# Altium PCB Microcontroller_PCB_2_Layer.PcbDoc
Units mm, origin at the board's own origin, x right, y up, seen from the top; angles counter-clockwise.
Board outline 69 x 47 mm, 2 copper layers (Top Layer, Bottom Layer), stack 1.601 mm thick; 50 components, 46 nets, 216 pads, 104 vias.
Unrouted connection lines stored in the file: 3.
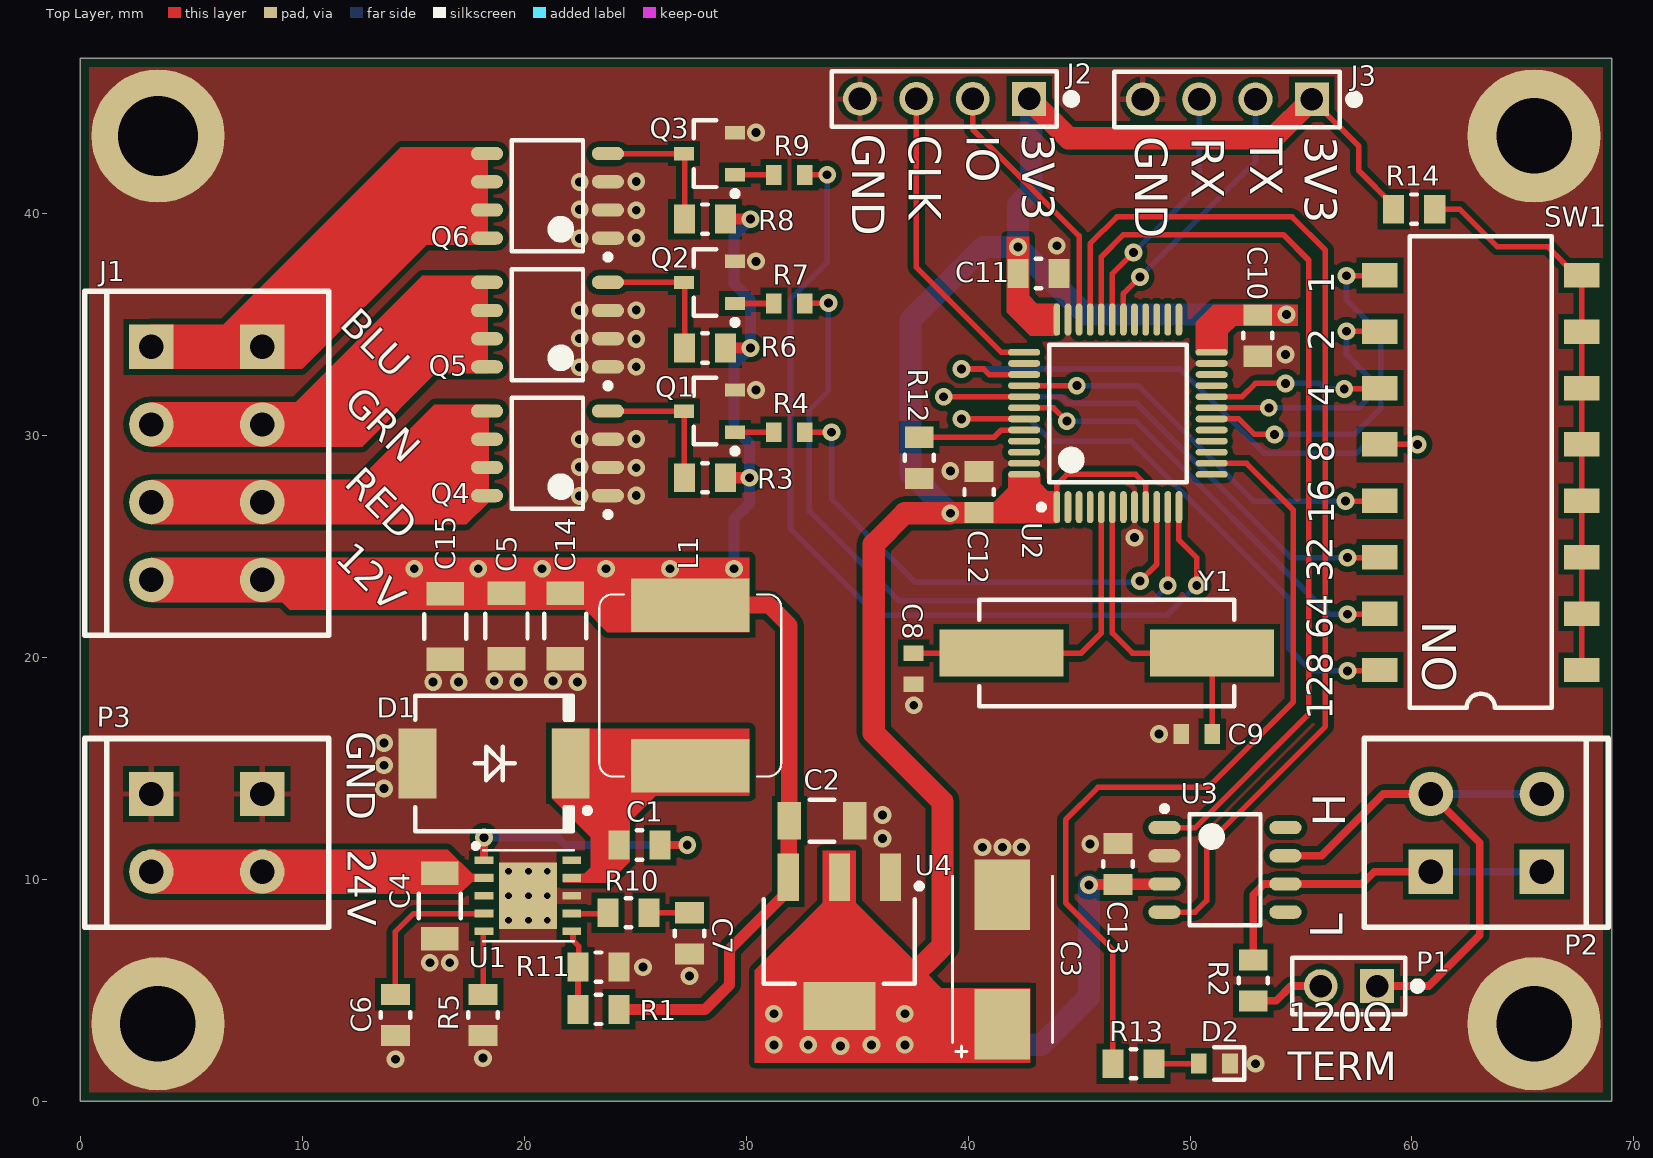
[diagram p0: Top Layer view]
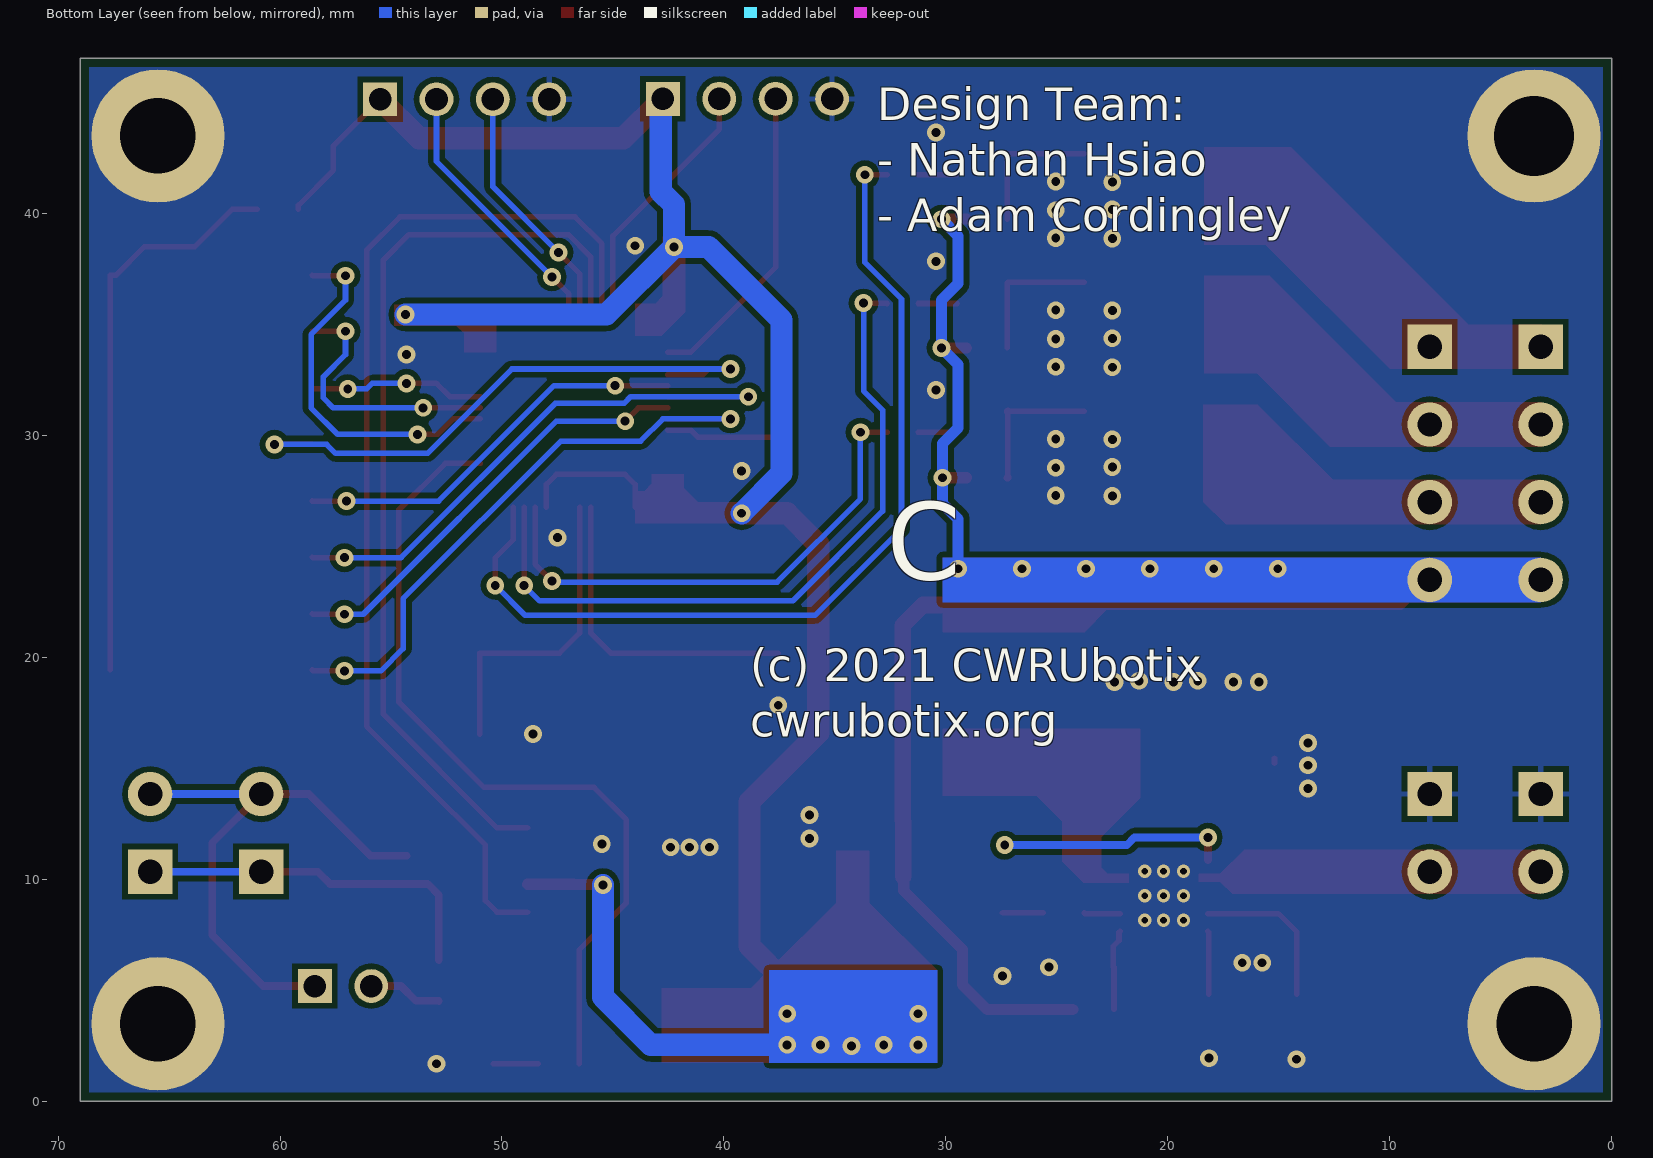
[diagram p1: Bottom Layer view, seen from below]

## Layer stack, top to bottom
Top Solder: solder mask 0.0102, Solder Resist, Dk 3.5
Top Layer: signal copper 0.0356
Dielectric 1: dielectric 1.53, FR-4, Dk 4.8
Bottom Layer: signal copper 0.0356
Bottom Solder: solder mask 0.0102, Solder Resist, Dk 3.5

## Board outline
0,0 69,0 69,47 0,47

## Design rules (kind name [scope] priority, off if disabled: settings)
BoardOutlineClearance [All] p1: gap=0.4 ignorepadtopadclearanceinfootprint=FALSE except(0: Arc-SplitContinuation Track-SplitContinuation SMDPad-SplitContinuation THPad-SplitContinuation Via-SplitContinuation Fill-SplitContinuation Poly-SplitContinuation Region-SplitContinuation Text-SplitContinuation)
Clearance [All] p1: gap=0.25 ignorepadtopadclearanceinfootprint=FALSE except(0: Arc-Hole Track-Hole SMDPad-Text SMDPad-Hole THPad-Hole Via-Hole Fill-Hole Poly-Hole Region-Hole Text-Hole; 0.2: Arc-Arc Arc-Track Arc-SMDPad Arc-THPad Arc-Via Track-Track Track-SMDPad Track-THPad Track-Via SMDPad-SMDPad SMDPad-THPad SMDPad-Via THPad-THPad THPad-Via Via-Via; 0.254: Arc-Text Track-Text THPad-Text Via-Text Fill-Text Poly-Text Region-Text Text-Text)
HoleSize [All] p1: absolutevalues=TRUE maxlimit=6 minlimit=0.2 maxpercent=80.000 minpercent=20.000
MinimumSolderMaskSliver [All] p1: minsoldermaskwidth=0.15
PolygonConnect [All] p1: thpad.connectstyle=Relief thpad.reliefconductorwidth=0.254 thpad.reliefentries=4 thpad.polygonreliefangle="90 Angle" thpad.airgapwidth=0.254 smdpad.connectstyle=Direct smdpad.reliefconductorwidth=0.254 smdpad.reliefentries=4 smdpad.polygonreliefangle="90 Angle" smdpad.airgapwidth=0.254 via.connectstyle=Direct via.reliefconductorwidth=0.254 via.reliefentries=4 via.polygonreliefangle="90 Angle" via.airgapwidth=0.254
RoutingVias [All] p1: holewidth=0.17 width=0.27 viastyle="Through Hole" minholewidth=0.15 minwidth=0.25 maxholewidth=0.2 maxwidth=0.45
SMDNeckDown [All] p1: percent=100.000
SilkToSilkClearance [All] p1: silktosilkclearance=0
SilkToSolderMaskClearance [IsPad] p1: minsilkscreentomaskgap=0 clearancetoexposedcopper=TRUE
SolderMaskExpansion [All] p1: expansion=0.102 istentingtop=FALSE
Width [All] p1: maxlimit=25 minlimit=0.15 preferedwidth=0.25 minimp=50.000000 maximp=50.000000 favimp=50.000000
26 further rules are at their usual default settings.

## Components (designator, comment, footprint, x,y, rotation, side; value= is the part's Value field where it differs from the comment)
C1 "0.10uF" chip_0805 25.2,11.55 r0 top
C2 "10uF" chip_1206 33.425,12.65 r0 top
C3 "100uF" chip_2917_AVX_TAJD 41.55,6.4 r90 top
C4 "2.2uF" chip_1206 16.2,8.8 r270 top
C5 "22uF" chip_1206 19.2,21.425 r270 top
C6 "2700pF" chip_0805 14.2,3.9 r270 top
C7 "820pF" chip_0805 27.45,7.575 r270 top
C8 "18pF" chip_0603 37.55,19.5 r90 top
C9 "18pF" chip_0603 50.3,16.55 r180 top
C10 "0.10uF" chip_0805 53.05,34.5 r90 top
C11 "0.10uF" chip_0805 43.175,37.3 r0 top
C12 "0.10uF" chip_0805 40.5,27.45 r270 top
C13 "0.10uF" chip_0805 46.75,10.7 r270 top
C14 "22uF" chip_1206 21.85,21.425 r270 top
C15 "2.2uF" chip_1206 16.45,21.4 r270 top
D1 "700mV" do-214ab 18.645,15.23 r180 top
D2 "2.65V" chip_0603_LED 51.1,1.7 r180 top
J1 "conn-4x1_0" TERM_3.50MM_4x1_0 8.2,34 r270 top
J2 "conn-4x1_0" HDDR_4x1_0 42.75,45.17 r180 top
J3 "conn-4x1_0" HDDR_4x1_0 55.49,45.15 r180 top
L1 "ind_1" VISHAY_IHLP3232DZ 27.485,18.745 r90 top
P1 "conn-2x1_0" HDDR_2x1_0 57.15,5.2 r180 top
P2 "conn-2x1_0" TERM_3.50MM_2x1_0 65.85,10.35 r90 top
P3 "conn-2x1_0" TERM_3.50MM_2x1_0 3.2,13.85 r270 top
Q1 "MMBT3904LT1G" SOT-23-3_1 28.35,31.1 r180 top
Q2 "MMBT3904LT1G" SOT-23-3_1 28.35,36.9 r180 top
Q3 "MMBT3904LT1G" SOT-23-3_1 28.35,42.7 r180 top
Q4 "FDS5351" SO-8 21.05,29.2 r180 top
Q5 "FDS5351" SO-8 21.05,35 r180 top
Q6 "FDS5351" SO-8 21.05,40.8 r180 top
R1 "60.4k" chip_0805 23.35,4.15 r180 top
R2 "120" chip_0805 52.85,5.45 r90 top
R3 "1k" chip_0805 28.15,28.1 r180 top
R4 "3.3k" chip_0603 31.95,30.15 r0 top
R5 "174k" chip_0805 18.15,3.9 r270 top
R6 "1k" chip_0805 28.15,33.95 r180 top
R7 "3.3k" chip_0603 31.95,35.95 r0 top
R8 "1k" chip_0805 28.15,39.75 r180 top
R9 "3.3k" chip_0603 31.95,41.75 r0 top
R10 "23.7k" chip_0805 24.7,8.5 r0 top
R11 "11.5k" chip_0805 23.35,6.05 r0 top
R12 "1k" chip_0805 37.8,29 r270 top
R13 "665" chip_0805 47.45,1.7 r180 top
R14 "665" chip_0805 60.1,40.2 r180 top
SW1 "DIP_SW_8" A6S-8104-H 67.55,19.44 r180 top
U1 "TPS54561" WSON-10_0 20.195,9.265 r0 top
U2 "STM32F103C8" LQFP48_0 46.75,31 r90 top
U3 "SN65HVD232" SO-8 51.575,10.435 r0 top
U4 "LM1117" sot-223-4 34.2,7.2 r270 top
Y1 "osc_xtal_2p_0" ABLS_AT49_OSC 46.25,20.2 r0 top

## Footprints (in the part's own frame and the unit in brackets; to place one, negate y for a bottom-side part, rotate by r counter-clockwise, add the part's x,y. Pads: shape width x height; smd on the part's side, far side on the other; paste and mask are expansions set on the pad)
A6S-8104-H [mm]
  rect 1.6x1.1 smd: 1(-0.1,0) 2(-0.1,-2.54) 3(-0.1,-5.08) 4(-0.1,-7.62) 5(-0.1,-10.16) 6(-0.1,-12.7) 7(-0.1,-15.24) 8(-0.1,-17.78) 9(9,-17.78) 10(9,-15.24) 11(9,-12.7) 12(9,-10.16) 13(9,-7.62) 14(9,-5.08) 15(9,-2.54) 16(9,0)
  silkscreen extent 1.25,-19.55 7.65,1.7, body extent -0.45,-19.53 9.35,1.73, height 4.4
ABLS_AT49_OSC [mil] "ABLS Crystal Oscillator"
  rect 220x83 smd: 1(-187.01,0) 2(186.99,0)
  silkscreen extent -226,-94 226,94, body extent -224,-94 224,94, height 157
chip_0603 [mm]
  rect 0.7x0.9 smd: 1(-0.7,0) 2(0.7,0)
  body extent -0.85,-0.45 0.85,0.45, height 0.6
chip_0603_LED [mm]
  rect 0.7x0.9 smd: 1(-0.7,0) 2(0.7,0)
  silkscreen extent -1.35,-0.75 0,0.73, body extent -0.85,-0.45 0.85,0.45, height 0.6
chip_0805 [mm]
  rect 0.95x1.3 smd: 1(-0.925,0) 2(0.925,0)
  silkscreen extent -0.13,-0.66 0.13,0.66, body extent -1.05,-0.65 1.05,0.65, height 0.6
chip_1206 [mm]
  rect 1.05x1.7 smd: 1(-1.475,0) 2(1.475,0)
  silkscreen extent -0.55,-0.95 0.55,0.95, body extent -1.65,-0.85 1.65,0.85, height 0.6
chip_2917_AVX_TAJD [mm] "2917 footprint for AVX TAJD"
  rect 3.175x2.5 smd: 1(-2.921,0) 2(2.921,0)
  silkscreen extent -4.4,-2.25 3.75,2.25, body extent -3.75,-2.25 3.75,2.25, height 3.15
do-214ab [mm] "DO-214AB, SMC"
  rect 1.7x3.15 smd: 1(-3.45,0) 2(3.45,0)
  silkscreen extent -4.33,-3.05 3.55,3.05, body extent -3.56,-3.05 3.55,3.05, height 2.41
HDDR_2x1_0 [mil] "0.1\" Header 2x1"
  rect 60x60 hole 40: 1(-50.39,0)
  round 60 hole 40: 2(49.61,0)
  silkscreen extent -128,-50 100,50, body extent -100,-50 100,50, height 336
HDDR_4x1_0 [mil]
  rect 60x60 hole 40: 1(0,0)
  round 60 hole 40: 2(100,0) 3(200,0) 4(300,0)
  silkscreen extent -83,-49 350,49, body extent -50,-50 350,50, height 336
LQFP48_0 [mm] "LQFP48, 7.00x7.00mm, 0.50mm"
  oval 1.45x0.3 smd: 1(-4.225,2.75) 2(-4.225,2.25) 3(-4.225,1.75) 4(-4.225,1.25) 5(-4.225,0.75) 6(-4.225,0.25) 7(-4.225,-0.25) 8(-4.225,-0.75) 9(-4.225,-1.25) 10(-4.225,-1.75) 11(-4.225,-2.25) 12(-4.225,-2.75) 25(4.225,-2.75) 26(4.225,-2.25) 27(4.225,-1.75) 28(4.225,-1.25) 29(4.225,-0.75) 30(4.225,-0.25) 31(4.225,0.25) 32(4.225,0.75) 33(4.225,1.25) 34(4.225,1.75) 35(4.225,2.25) 36(4.225,2.75)
  oval 0.3x1.45 smd: 13(-2.75,-4.225) 14(-2.25,-4.225) 15(-1.75,-4.225) 16(-1.25,-4.225) 17(-0.75,-4.225) 18(-0.25,-4.225) 19(0.25,-4.225) 20(0.75,-4.225) 21(1.25,-4.225) 22(1.75,-4.225) 23(2.25,-4.225) 24(2.75,-4.225) 37(2.75,4.225) 38(2.25,4.225) 39(1.75,4.225) 40(1.25,4.225) 41(0.75,4.225) 42(0.25,4.225) 43(-0.25,4.225) 44(-0.75,4.225) 45(-1.25,4.225) 46(-1.75,4.225) 47(-2.25,4.225) 48(-2.75,4.225)
  silkscreen extent -4.35,-3.1 3.1,3.57, body extent -3.5,-3.5 3.5,3.5, height 1.6
SO-8 [mm] "SO-8 Package"
  oval 1.45x0.6 smd: 1(-2.725,1.905) 2(-2.725,0.635) 3(-2.725,-0.635) 4(-2.725,-1.905) 5(2.725,-1.905) 6(2.725,-0.635) 7(2.725,0.635) 8(2.725,1.905)
  silkscreen extent -2.85,-2.5 1.6,2.88, body extent -3.08,-2.5 3.08,2.5, height 2
SOT-23-3_1 [mm] "SOT-23-3 package"
  rect 0.9x0.6 smd: 1(-1.15,0.95) 2(-1.15,-0.95) 3(1.15,0)
  silkscreen extent -1.28,-1.5 0.7,1.92, body extent -1.42,-1.5 1.42,1.5, height 1.2
sot-223-4 [mm]
  rect 2.15x0.95 smd: 1(-2.9,2.3) 2(-2.9,0) 3(-2.9,-2.3)
  rect 2.15x3.25 smd: 4(2.9,0)
  silkscreen extent -2.62,-3.4 1.9,3.73, body extent -1.9,-3.4 1.9,3.4, height 1.1
TERM_3.50MM_2x1_0 [mm] "Terminal Block, 3.5mm pitch"
  rect 2x2 hole 1.1: 1(0,5) 1(0,0)
  round 2 hole 1.1: 2(3.5,0) 2(3.5,5)
  silkscreen extent -2.5,-3 6,8, body extent -2.5,-3 6,8, height 8.98
TERM_3.50MM_4x1_0 [mm]
  rect 2x2 hole 1.1: 1(0,0) 1(0,-5)
  round 2 hole 1.1: 2(3.5,0) 2(3.5,-5) 3(7,0) 3(7,-5) 4(10.5,0) 4(10.5,-5)
  silkscreen extent -2.5,-8 13,3, body extent -2.5,-8 13,3, height 8.98
VISHAY_IHLP3232DZ [mil] "Inductor, Vishay Dale, IHLP-3232DZ series"
  rect 95x210 smd: 1(-142.52,0) 2(142.52,0)
  silkscreen extent -161,-161 161,161, body extent -161,-161 161,161, height 157
WSON-10_0 [mm]
  rect 0.85x0.35 smd mask+0.07: 1(-2,1.6) 2(-2,0.8) 3(-2,0) 4(-2,-0.8) 5(-2,-1.6) 6(1.95,-1.6) 7(1.95,-0.8) 8(1.95,0) 9(1.95,0.8) 10(1.95,1.6)
  rect 2.6x3 smd mask+0.07: 11(-0.025,0)
  silkscreen extent -2.47,-2.05 2.05,2.35, body extent -2.05,-2.05 2.05,2.05, height 0.8

## Part data
C1 C10 C11 C12 C13: library part CAP-00069, "CAP, 0.10uF, 10%, 16V, X7R, 0805", Manufacturer=Murata, Manufacturer PN=GRM219R71C104KA01D, Tolerance=10%, Voltage Rating=16V, Capacitance=0.10uF, Part Number=CAP-00069, Type=X7R
C2: library part CAP-00539, "CAP, 10uF, ±10%, 25V, X7R, 1206", Manufacturer=Samsung, Manufacturer PN=CL31B106KAHNNNE, Tolerance=±10%, Voltage Rating=25V, Capacitance=10uF, Part Number=CAP-00539, Type=X7R
C3: library part CAP-00550, "CAP, 100uF, ±10%, 16V, Tantalum, 2917", Manufacturer=AVX, Manufacturer PN=TAJD107K016RNJ, Tolerance=±10%, Voltage Rating=16V, Capacitance=100uF, Cost=$0.94, Part Number=CAP-00550, Type=Tantalum
C4 C15: library part CAP-00563, "CAP, 2.2uF, ±10%, 50V, X7R, 1206", Manufacturer=KEMET, Manufacturer PN=C1206C225K5RACTU, Tolerance=±10%, Voltage Rating=50V, Capacitance=2.2uF, Cost=$0.33, Part Number=CAP-00563, Type=X7R
C5 C14: library part CAP-00587, "CAP, 22uF, ±10%, 25V, X5R, 1206", Manufacturer="Samsung Electro-Mechanics", Manufacturer PN=CL31A226KAHNNNE, Tolerance=±10%, Voltage Rating=25V, Capacitance=22uF, Cost=$0.41, Part Number=CAP-00587, Type=X5R
C6: library part CAP-00024, "CAP, 2700pF, 10%, 50V, X7R, 0805", Manufacturer=Murata, Manufacturer PN=GRM216R71H272KA01D, Tolerance=10%, Voltage Rating=50V, Capacitance=2700pF, Part Number=CAP-00024, Type=X7R
C7: library part CAP-00008, "CAP, 820pF, 10%, 50V, X7R, 0805", Manufacturer=Murata, Manufacturer PN=GRM216R71H821KA01D, Tolerance=10%, Voltage Rating=50V, Capacitance=820pF, Part Number=CAP-00008, Type=X7R
C8 C9: library part CAP-00409, "CAP, 18pF, ±2%, 50V, C0G, 0603", Manufacturer=Murata, Manufacturer PN=GRM1885C1H180GA01D, Tolerance=±2%, Voltage Rating=50V, Capacitance=18pF, Part Number=CAP-00409, Type=C0G
D1: library part DIO-00048, "Dio, Schottky, 5A, 700mV, 60V, SMC", Current Rating=5A, Manufacturer="Diodes Incorporated", Manufacturer PN=B560C-13-F, Reverse Breakdown Voltage=60V, Cost=0.5, Forward Voltage=700mV, Part Number=DIO-00048, Type=Schottky
D2: library part DIO-00050, "LED, Green, 0603, Low current, HELI2 Series", Current Rating=30mA, Manufacturer=Kingbright, Manufacturer PN=APT1608LZGCK, Power Rating=120mW, Reverse Breakdown Voltage=5V, Cost=0.58, Forward Voltage=2.65V, Part Number=DIO-00050, Type=LED
J1: library part CONN-00024, "Term Blk, 4 Pos, 8A, 3.5mm Pitch, Screwless", Current=8, Manufacturer="Phoenix Contact", Manufacturer PN=1861959, Cost=1.67, Levels=1, Part Number=CONN-00024, Positions per level=4, Type="Terminal Block", Weight=2.3
J2 J3: library part CONN-00029, "Header 4x1, 0.1\"", Levels=1, Part Number=CONN-00029, Positions per level=4, Type=Header
L1: library part MAG-00106, "Ind, 10uH, 20%, 5.2A (9A sat.), 0.0599 Ohm", Current Rating=5.2A, Inductance=10uH, Manufacturer="Vishay Dale", Manufacturer PN=IHLP3232DZER100M01, Tolerance=20%, Cost=1.65, DCR=59.9mOhm, Part Number=MAG-00106
P1: library part CONN-00055, "Header, 2x1, 0.1\"", Manufacturer=Samtec, Manufacturer PN=TSW-102-07-F-S, Cost=0.2, Levels=1, Part Number=CONN-00055, Positions per level=2, Type=Header
P2 P3: library part CONN-00023, "Term Blk, 2 Pos, 8A, 3.5mm Pitch, Screwless", Current=8, Manufacturer="Phoenix Contact", Manufacturer PN=1861933, Cost=0.79, Levels=1, Part Number=CONN-00023, Positions per level=2, Type="Terminal Block", Weight=1.13
Q1 Q2 Q3: library part XSTR-00037, "XSTR, NPN, 200mA, 40V, Vce 0.3V, SOT-23-3", Manufacturer="ON Semi", Max Current=200mA, Max Power=300mW, Max Voltage=40V, Cost=0.12, Manufacturer PN=MMBT3904LT1G, Part Number=XSTR-00037, Type=NPN, Vgs/Vce=0.3V
Q4 Q5 Q6: library part XSTR-00034, "XSTR NFET, 6.1A, 60V, 5W, SOIC-8", Manufacturer="ON Semi", Max Current=6.1A, Max Power=5W, Max Voltage=60V, Cost=0.8, Manufacturer PN=FDS5351, Part Number=XSTR-00034, Type=NFET, Vgs/Vce=2.0V
R1: library part RES-00531, "RES SMD 60.4K OHM 1% 1/8W 0805", Manufacturer="Rohm Semiconductor", Manufacturer PN=KTR10EZPF6042, Power Rating=0.125W, Tolerance=1%, Part Number=RES-00531, Resistance=60.4k
R2: library part RES-00183, "RES SMD 120 OHM 1% 1/8W 0805", Manufacturer="Rohm Semiconductor", Manufacturer PN=KTR10EZPF1200, Power Rating=0.125W, Tolerance=1%, Part Number=RES-00183, Resistance=120
R3 R6 R8 R12: library part RES-00361, "RES SMD 1K OHM 1% 1/8W 0805", Manufacturer="Rohm Semiconductor", Manufacturer PN=KTR10EZPF1001, Power Rating=0.125W, Tolerance=1%, Part Number=RES-00361, Resistance=1k
R4 R7 R9: library part RES-00419, "RES SMD 3.3K OHM 1% 1/4W 0603", Manufacturer=Panasonic, Manufacturer PN=ERJ-PA3F3301V, Power Rating=0.25W, Tolerance=1%, Part Number=RES-00419, Resistance=3.3k
R5: library part RES-00350, "RES SMD 174K OHM 1% 1/8W 0805", Manufacturer="Rohm Semiconductor", Manufacturer PN=KTR10EZPF1743, Power Rating=0.125W, Tolerance=1%, Part Number=RES-00350, Resistance=174k
R10: library part RES-00392, "RES SMD 23.7K OHM 1% 1/8W 0805", Manufacturer="Rohm Semiconductor", Manufacturer PN=KTR10EZPF2372, Power Rating=0.125W, Tolerance=1%, Part Number=RES-00392, Resistance=23.7k
R11: library part RES-00309, "RES SMD 11.5K OHM 1% 1/8W 0805", Manufacturer="Rohm Semiconductor", Manufacturer PN=KTR10EZPF1152, Power Rating=0.125W, Tolerance=1%, Part Number=RES-00309, Resistance=11.5k
R13 R14: library part RES-00248, "RES SMD 665 OHM 1% 1/8W 0805", Manufacturer="Rohm Semiconductor", Manufacturer PN=KTR10EZPF6650, Power Rating=0.125W, Tolerance=1%, Part Number=RES-00248, Resistance=665
SW1: library part MISC-00045, "DIP Switch, 8 Switches, SMD, 25mA, 24V", Manufacturer=Omron, Manufacturer PN=A6S-8104-H, Cost=2.85, Part Number=MISC-00045
U1: library part PWREG-00033, "REG, SW Buck Adj, 5A, 4.5-60V, 2.5MHz, TPS54561", Frequency=100kHz-2.5MHz, Manufacturer=TI, Manufacturer PN=TPS54561DPRR, Max Current=5A, Voltage Range In=4.5-60V, Voltage Range Out=0.8-58.8V, Cost=5.52, Fixed/Adj=Adj, Part Number=PWREG-00033, Reg Type="SW Buck"
U2: library part UCTRL-00008, "STM32 M3, LQFP-48", Manufacturer=ST, Manufacturer PN=STM32F103C8, Part Number=UCTRL-00008
U3: library part IFACE-00008, "CANbus Transceiver, Single channel, SN65HVD232", Manufacturer=TI, Manufacturer PN=SN65HVD232DR, Cost=2.01, Part Number=IFACE-00008
U4: library part PWREG-00018, "REG, Linear, Fixed 3V3, 800mA, SOT-223", Manufacturer=TI, Manufacturer PN=LM1117MPX-3.3/NOPB, Max Current=800mA, Voltage Range In="4.5 - 15V", Voltage Range Out=3.3V, Cost=1.14, Fixed/Adj=Fixed, Part Number=PWREG-00018, Reg Type=Linear
Y1: library part OSC-00002, "XTAL, 8MHz, 18pF, 20ppm", Frequency=8.000M, Load Capacitance=18pF, Manufacturer=Abracon, Manufacturer PN=ABLS-8.000MHZ-B2-T, Tolerance=20ppm, ESR=80, Part Number=OSC-00002, Stability=50ppm

## Free pads (board coordinates)
  round 6 hole 3.4: 0(3.5,3.5) 0(65.5,3.5) 0(65.5,43.5)
  round 6 hole 3.6: 0(3.5,43.5)

## Via types
v1: diameter 0.8, hole 0.4, Top Layer to Bottom Layer, tented both sides, 95 vias
v2: diameter 0.6, hole 0.3, Top Layer to Bottom Layer, 9 vias

## Nets (pads, with @x,y where several pads share a name; then routed paths per layer and width w, separated by ;. In a path a pad name is that pad's centre, name@x,y a point inside that pad or via, vN(x,y) a via of type N, cw(c..) or ccw(c..) an arc to the next point about the centre after c; other vN are vias at no path point)
+12: C2.1 C5.1 C14.1 C15.1 J1.4 L1.2 R1.1 R3.1 R6.1 R8.1 U4.3 | length 48.2
  Top Layer w0.5: R1.1 28.15,4.15 29.25,5.25 29.25,6.85 31.9,9.5 U4.3 U4.3@31.925,10.125 ; R3.1 v1(30.15,28.1) ; R6.1 v1(30.2,33.95) ; R8.1 v1(30.2,39.75) ; C2.1@31.925,12.625 C2.1
  Top Layer w0.75: L1.2 31.035,22.365 31.95,21.45 C2.1 ; U4.3@31.925,10.125 C2.1@31.925,12.625
  Bottom Layer w0.5: v1(29.45,24) 29.45,26.25 30.15,26.95 v1(30.15,28.1) 30.15,29.65 29.45,30.35 29.45,33.2 v1(30.2,33.95) 30.2,36.1 29.45,36.85 29.45,39 v1(30.2,39.75)
  other v1: 15.05,24 17.93,24 20.81,24 23.69,24 26.57,24
+24: C4.1 P3.2 U1.2
CAN_ID_1: SW1.9 U2.18 | length 16.5
  Top Layer w0.25: U2.18 52.2,30.75 52.9,30.05 v1(53.8,30.05) ; v1(57.05,37.2) 58.53,37.2 SW1.9
  Bottom Layer w0.25: v1(53.8,30.05) 57.4,30.05 58.6,31.25 58.6,34.55 57.05,36.1 v1(57.05,37.2)
CAN_ID_2: SW1.10 U2.19 | length 12.2
  Top Layer w0.25: U2.19 v1(53.55,31.25) ; v1(57.05,34.7) 58.53,34.7 SW1.10
  Bottom Layer w0.25: v1(53.55,31.25) 57.6,31.25 58.05,31.7 58.05,32.65 57.05,33.65 v1(57.05,34.7)
CAN_ID_4: SW1.11 U2.20 | length 7.9
  Top Layer w0.25: U2.20 52.35,31.75 52.95,32.35 v1(54.3,32.35) ; v1(56.95,32.1) 58.51,32.1 SW1.11
  Bottom Layer w0.25: v1(54.3,32.35) 55.85,32.35 56.1,32.1 v1(56.95,32.1)
CAN_ID_8: SW1.12 U2.39 | length 26.9
  Top Layer w0.25: v1(39.7,33) 40.7,33 40.95,32.75 U2.39 ; SW1.12 v1(60.252,29.6)
  Bottom Layer w0.25: v1(39.7,33) 49.55,33 53.35,29.2 57.5,29.2 57.9,29.6 v1(60.252,29.6)
CAN_ID_16: SW1.13 U2.40 | length 18.2
  Top Layer w0.25: U2.40 v1(44.9,32.25) ; v1(57,27.05) 58.54,27.05 SW1.13
  Bottom Layer w0.25: v1(44.9,32.25) 47.65,32.25 52.85,27.05 v1(57,27.05)
CAN_ID_32: SW1.14 U2.41 | length 26.3
  Top Layer w0.25: v1(38.9,31.75) U2.41 ; v1(57.1,24.5) 58.53,24.5 SW1.14
  Bottom Layer w0.25: v1(38.9,31.75) 44.2,31.75 44.5,31.45 47.6,31.45 54.55,24.5 v1(57.1,24.5)
CAN_ID_64: SW1.15 U2.42 | length 19.9
  Top Layer w0.25: U2.42 43.85,31.25 v1(44.45,30.65) ; v1(57.1,21.95) 58.52,21.95 SW1.15
  Bottom Layer w0.25: v1(44.45,30.65) 47.55,30.65 56.25,21.95 v1(57.1,21.95)
CAN_ID_128: SW1.16 U2.43 | length 27.7
  Top Layer w0.25: v1(39.7,30.75) U2.43 ; v1(57.1,19.4) 58.51,19.4 SW1.16
  Bottom Layer w0.25: v1(39.7,30.75) 42.75,30.75 43.75,29.75 47.35,29.75 54.45,22.65 54.45,20.4 55.45,19.4 v1(57.1,19.4)
CANH: P1.1 P2.2 U3.7 | length 25.5
  Top Layer w0.35: U3.7 55.92,11.07 58.7,13.85 60.85,13.85 63.05,11.65 63.05,7.5 60.75,5.2 P1.1
  Bottom Layer w0.35: P2.2@60.85,13.85 P2.2@65.85,13.85
CANL: P2.1 R2.2 U3.6 | length 16.4
  Top Layer w0.35: R2.2 52.85,9.3 53.35,9.8 57.75,9.8 58.3,10.35 P2.1@60.85,10.35
  Bottom Layer w0.35: P2.1@60.85,10.35 P2.1@65.85,10.35
CANRX: U2.33 U3.4 | length 48.8
  Top Layer w0.25: U2.33 45.5,38.65 46.7,39.85 54.6,39.85 56.1,38.35 56.1,16.9 53.55,14.35 50.75,11.55 50.75,9.05 50.23,8.53 U3.4
CANTX: U2.32 U3.1 | length 42.1
  Top Layer w0.25: U2.32 46,38.05 47,39.05 54.2,39.05 55.35,37.9 55.35,17.45 50.24,12.34 U3.1
GND: C2.2 C3.2 C4.2 C5.2 C6.2 C7.2 C8.1 C9.2 C10.1 C11.2 C12.1 C13.1 C14.2 C15.2 D1.2 D2.1 J2.4 J3.4 P3.1 pad.0 Q1.2 Q2.2 Q3.2 Q4.1 Q4.2 Q4.3 Q5.1 Q5.2 Q5.3 Q6.1 Q6.2 Q6.3 R5.2 R11.2 R12.2 U1.8 U1.11 U2.8 U2.23 U2.35 U2.47 U3.2 U4.1 | length 0.2
  Top Layer w0.25: D1.2 D1.2@15.195,15.47
  other v1: 52.95,1.7 14.2,1.9 18.15,1.95 27.45,5.65 25.35,6.05 15.75,6.25 16.65,6.25 40.65,11.45 41.55,11.45 42.4,11.45 45.5,11.6 36.15,11.85 36.15,12.9 13.69,14.095 13.69,15.145 13.69,16.145 48.6,16.55 37.55,17.85 15.9,18.9 17.05,18.9 19.75,18.9 22.4,18.9 18.65,18.95 21.3,18.95 47.5,25.4 22.5,27.28 25.05,27.3 39.2,28.4 25.05,28.55 22.5,28.58 22.5,29.83 25.05,29.85 30.45,32.05 22.5,33.08 25.05,33.1 54.3,33.65 25.05,34.35 22.5,34.38 22.5,35.63 25.05,35.65 30.45,37.85 44,38.55 22.5,38.88 25.05,38.9 25.05,40.15 22.5,40.18 22.5,41.43 25.05,41.45 30.45,43.65
  other v2: 19.295,8.165 20.195,8.165 21.045,8.165 19.295,9.265 20.195,9.265 21.045,9.265 19.295,10.365 20.195,10.365 21.045,10.365
LED_BLUE: J1.1 Q6.5 Q6.6 Q6.7 Q6.8
LED_GREEN: J1.2 Q5.5 Q5.6 Q5.7 Q5.8
LED_RED: J1.3 Q4.5 Q4.6 Q4.7 Q4.8
NetC1_1: C1.1 D1.1 L1.1 U1.9
NetC1_2: C1.2 U1.1 | length 11.6
  Top Layer w0.25: v1(18.195,11.895) v1@18.2,11.9
  Top Layer w0.35: U1.1 v1(18.195,11.895) ; C1.2 v1(27.35,11.55)
  Bottom Layer w0.35: v1(18.195,11.895) 21.505,11.895 21.85,11.55 v1(27.35,11.55)
NetC6_1: C6.1 U1.4 | length 7.2
  Top Layer w0.25: C6.1 14.2,7.65 15.015,8.465 U1.4
NetC7_1: C7.1 R10.2 | length 1.8
  Top Layer w0.25: R10.2 C7.1
NetC8_2: C8.2 U2.5 Y1.1 | length 14.5
  Top Layer w0.25: C8.2 Y1.1 45.1,20.2 46,21.1 U2.5
NetC9_1: C9.1 U2.6 Y1.2 | length 14.2
  Top Layer w0.25: U2.6 46.5,21.1 47.4,20.2 Y1.2 ; C9.1 Y1.2
NetD2_2: D2.2 R13.1 | length 2
  Top Layer w0.25: R13.1 D2.2
NetP1_2: P1.2 R2.1 | length 3.3
  Top Layer w0.35: R2.1 52.863,4.538 53.888,4.538 54.55,5.2 P1.2
NetQ1_1: Q1.1 R4.1 | length 1.7
  Top Layer w0.25: Q1.1 R4.1
NetQ1_3: Q1.3 Q4.4 R3.2 | length 6.4
  Top Layer w0.25: Q4.4 23.778,31.102 27.198,31.102 Q1.3 ; R3.2@27.213,28.113 Q1.3@27.213,31.087
  Top Layer w0.35: Q1.3 Q1.3@27.213,31.087 ; R3.2@27.213,28.113 R3.2
NetQ2_1: Q2.1 R7.1 | length 1.7
  Top Layer w0.25: Q2.1 R7.1
NetQ2_3: Q2.3 Q5.4 R6.2 | length 6.4
  Top Layer w0.25: Q5.4 23.778,36.903 27.197,36.903 Q2.3 27.225,36.875 R6.2
NetQ3_1: Q3.1 R9.1 | length 1.7
  Top Layer w0.25: Q3.1 R9.1
NetQ3_3: Q3.3 Q6.4 R8.2 | length 6.4
  Top Layer w0.25: Q6.4 23.777,42.702 27.198,42.702 Q3.3 27.225,42.675 R8.2
NetR1_2: R1.2 R11.1 U1.6 | length 3.7
  Top Layer w0.25: U1.6 22.15,7.665 22.2,7.615 22.2,7.25 22.45,7 22.45,6.075 R11.1 R1.2
NetR5_1: R5.1 U1.5 | length 2.9
  Top Layer w0.25: R5.1 18.15,7.62 U1.5
NetR10_1: R10.1 U1.7 | length 1.6
  Top Layer w0.25: U1.7 23.74,8.465 R10.1
NetR12_1: R12.1 U2.44 | length 4.9
  Top Layer w0.25: R12.1 41.175,29.925 41.49,30.24 42.515,30.24 U2.44
NetR14_1: R14.1 SW1.1 SW1.2 SW1.3 SW1.4 SW1.5 SW1.6 SW1.7 SW1.8 | length 25.6
  Top Layer w0.25: R14.1 62.15,40.2 63.85,38.5 66.12,38.5 67.4,37.22 SW1.8 SW1.7 SW1.6 SW1.5 SW1.4 SW1.3 SW1.2 SW1.1
PA0-WKUP: R4.2 U2.10 | length 23.3
  Top Layer w0.25: R4.2 v1(33.85,30.15) ; v1(47.75,23.45) 48.5,24.2 U2.10
  Bottom Layer w0.25: v1(33.85,30.15) 33.85,27.15 37.6,23.4 47.7,23.4 v1(47.75,23.45)
PA1: R7.2 U2.11 | length 32.4
  Top Layer w0.25: R7.2 32.67,35.97 v1(33.71,35.97) ; v1(49,23.25) U2.11
  Bottom Layer w0.25: v1(33.71,35.97) 33.71,32.01 32.85,31.15 32.85,26.6 36.9,22.55 48.3,22.55 v1(49,23.25)
PA2: R9.2 U2.12 | length 42
  Top Layer w0.25: R9.2 v1(33.65,41.75) ; U2.12 49.5,25.3 50.3,24.5 v1(50.3,23.25)
  Bottom Layer w0.25: v1(33.65,41.75) 33.65,37.8 32,36.15 32,25.8 35.9,21.9 48.95,21.9 v1(50.3,23.25)
PA4: R13.2 U2.14 | length 37.5
  Top Layer w0.25: R13.2 46.525,6.825 44.4,8.95 44.4,12.7 45.85,14.15 50.8,14.15 54.65,18 54.65,26.65 52.55,28.75 U2.14
SWDCLK: J2.3 U2.37 | length 14.1
  Top Layer w0.25: J2.3@37.6,45.1 J2.3 37.67,37.58 41.5,33.75 U2.37
SWDIO: J2.2 U2.34 | length 12
  Top Layer w0.25: J2.2@40.24,45.2 J2.2 40.21,43.79 45,39 U2.34 U2.34@45.01,35.235
USART1_RX: J3.3 U2.31 | length 11.5
  Top Layer w0.25: U2.31 46.5,37.3 v1(47.45,38.25)
  Bottom Layer w0.25: v1(47.45,38.25) 50.41,41.21 J3.3
USART1_TX: J3.2 U2.30 | length 12.4
  Top Layer w0.25: U2.30 47,36.4 v1(47.75,37.15)
  Bottom Layer w0.25: v1(47.75,37.15) 52.95,42.35 J3.2
VCC: C3.1 C10.2 C11.1 C12.2 C13.2 J2.1 J3.1 R14.2 U2.1 U2.9 U2.24 U2.36 U2.48 U3.3 U4.2 U4.4 | length 107.9
  Top Layer w0.25: U2.1 44,27.8 44.45,28.25 47.55,28.25 48,27.8 U2.9 ; J3.1 57.6,43.04 57.6,41.95 59.175,40.375 R14.2
  Top Layer w0.35: v1(45.45,9.75) v1@45.475,9.775
  Top Layer w0.5: v1@45.475,9.775 C13.2 C13.2@46.762,9.788 ; C13.2@46.775,9.8 C13.2@46.762,9.788 ; U3.3 48.837,9.788 C13.2@46.762,9.788
  Top Layer w1: v1(37.15,3.95) 37.15,5.3 38.85,7 38.85,13.5 35.75,16.6 35.75,25.1 37.15,26.5 v1(39.2,26.5) ; J2.1 44.519,43.4 53.74,43.4 J3.1
  Bottom Layer w1: v1(37.15,2.55) 43.3,2.55 45.45,4.7 v1(45.45,9.75) ; v1(39.2,26.5) 37.4,28.3 37.4,35.2 40.7,38.5 v1(42.25,38.5) ; J2.1 42.85,45.069 42.85,41 42.25,40.4 v1(42.25,38.5) ; v1(54.35,35.45) 45.3,35.45 v1(42.25,38.5)
  other v1: 34.25,2.5 31.25,2.55 32.8,2.55 35.65,2.55 31.25,3.95
pads on no net: U1.3 U1.10 U2.2 U2.3 U2.4 U2.7 U2.13 U2.15 U2.16 U2.17 U2.21 U2.22 U2.25 U2.26 U2.27 U2.28 U2.29 U2.38 U2.45 U2.46 U3.5 U3.8

## Polygon pours and split planes (outlines as drawn)
GND on Bottom Layer "GND_L02_P011" (solid, pour order 11): 0,0 69,0 69,47 0,47
GND on Top Layer "GND_L01_P010" (solid, pour order 10): 0,0 69,0 69,47 0,47

## Other copper
Top Layer:
  region net VCC: 54.85,34.95 52.05,34.95 51.7,34.6 51.7,33.75 50.25,33.75 50.25,35.1 51.05,35.9 54.85,35.9
  region net VCC: 41.75,38.95 41.75,35.55 42.8,34.5 44,34.5 44,35.95 43.1,35.95 42.75,36.3 42.75,38.95
  region net VCC: 38.7,27 41.15,27 41.8,27.65 41.8,28.25 43.25,28.25 43.25,27.85 43.6,27.5 44,27.5 44,26.05 38.7,26.05
  region net LED_BLUE: 3.15,33 10,33 15.6,38.6 18.35,38.6 18.35,43 14.45,43 6.45,35 3.15,35
  region net LED_GREEN: 3.15,29.5 12.7,29.5 16,32.8 18.35,32.8 18.35,37.2 15.4,37.2 9.7,31.5 3.15,31.5
  region net LED_RED: 3.2,26 17.4,26 18.4,27 18.4,31.4 15.95,31.4 12.55,28 3.2,28
  region net VCC: 38,5.9 38.8,5.1 42.8,5.1 42.8,1.75 30.4,1.75 30.4,5.9 33.45,8.95 33.45,11.3 34.95,11.3 34.95,8.95
  region net +12: 9.45,22.15 9.1,22.5 3.2,22.5 3.2,24.5 30.15,24.5 30.15,21.15 23.75,21.15 22.75,22.15
  region net NetC1_1: 23.8,9.85 24.75,10.8 24.75,12.6 25.925,13.775 30.15,13.775 30.15,16.8 21.25,16.8 21.25,13.65 23,11.9 23,10.55 22.7,10.25 21.75,10.25 21.75,9.85
  region net +24: 3.2,11.35 16.55,11.35 17.65,10.25 18.6,10.25 18.6,9.9 17.65,9.9 17.1,9.35 3.2,9.35
Bottom Layer:
  region net VCC: 30.4,5.9 37.95,5.9 37.95,1.75 30.4,1.75
  region net +12: 9.1,22.5 3.2,22.5 3.2,24.5 30.15,24.5 30.15,22.5

## Silkscreen, mask and mechanical layers (free items; w line width, h text height)
Top Overlay:
  text "GND" at 34.289,43.596 h2.5 r270
  text "3V3" at 41.939,43.596 h2.5 r270
  text "CLK" at 36.839,43.563 h2.5 r270
  text "IO" at 39.439,43.546 h2.5 r270
  text "GND" at 47.029,43.476 h2.5 r270
  text "3V3" at 54.679,43.476 h2.5 r270
  text "RX" at 49.579,43.443 h2.5 r270
  text "TX" at 52.219,43.402 h2.5 r270
  text "1" at 56.87,36.375 h2 r90
  text "BLU" at 11.326,34.653 h2.2 r315
  text "2" at 56.87,33.825 h2 r90
  text "4" at 56.87,31.325 h2 r90
  text "GRN" at 11.508,31.121 h2.2 r315
  text "8" at 56.87,28.775 h2 r90
  text "RED" at 11.526,27.503 h2.2 r315
  text "16" at 56.87,26 h2 r90
  text "12V" at 11.126,24.103 h2.2 r315
  text "32" at 56.82,23.425 h2 r90
  text "64" at 56.82,20.825 h2 r90
  text "128" at 56.82,17.187 h2 r90
  text "GND" at 11.569,16.676 h2.2 r270
  text "H" at 57.478,12.387 h2.5 r90
  text "24V" at 11.622,11.363 h2.2 r270
  text "L" at 57.381,7.345 h2.5 r90
  text "120Ω / TERM" at 54.407,0.525 h2.2
Bottom Overlay:
  text "Design Team: / - Nathan Hsiao / - Adam Cordingley" at 33.1,38.7 h2.5
  text "C" at 32.674,22.346 h6
  text "(c) 2021 CWRUbotix / cwrubotix.org" at 38.812,15.926 h2.5
Mechanical 1:
  the board outline again, w0.05

## Text inside footprints (layer, text, board x,y; h text height)
SW1: Top Overlay "ON" at 61.996,18.444 h1.52 r90